# Altium PCB 4_layer.PcbDoc (part 1 of 2)
Units mm, origin at the board's own origin, x right, y up, seen from the top; angles counter-clockwise.
Board outline 78.3 x 43.68 mm, 4 copper layers (Top Layer, GND, PWR, Bottom Layer), stack 1.795 mm thick; 72 components, 60 nets, 280 pads, 137 vias.
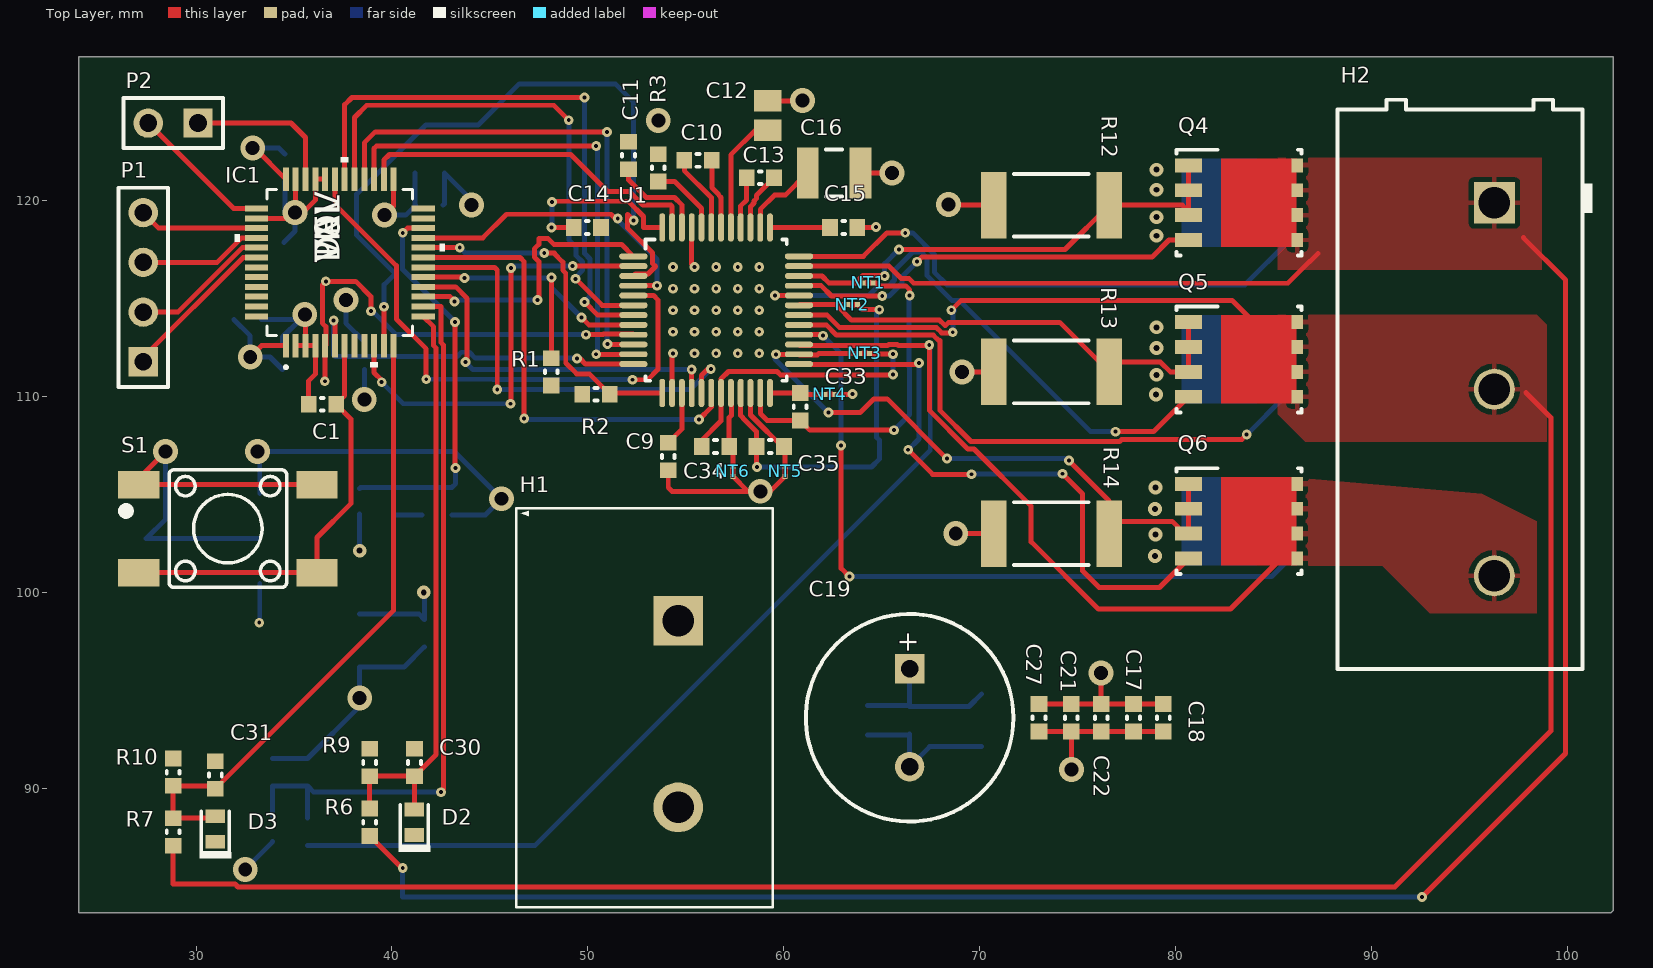
[diagram p0: Top Layer view]
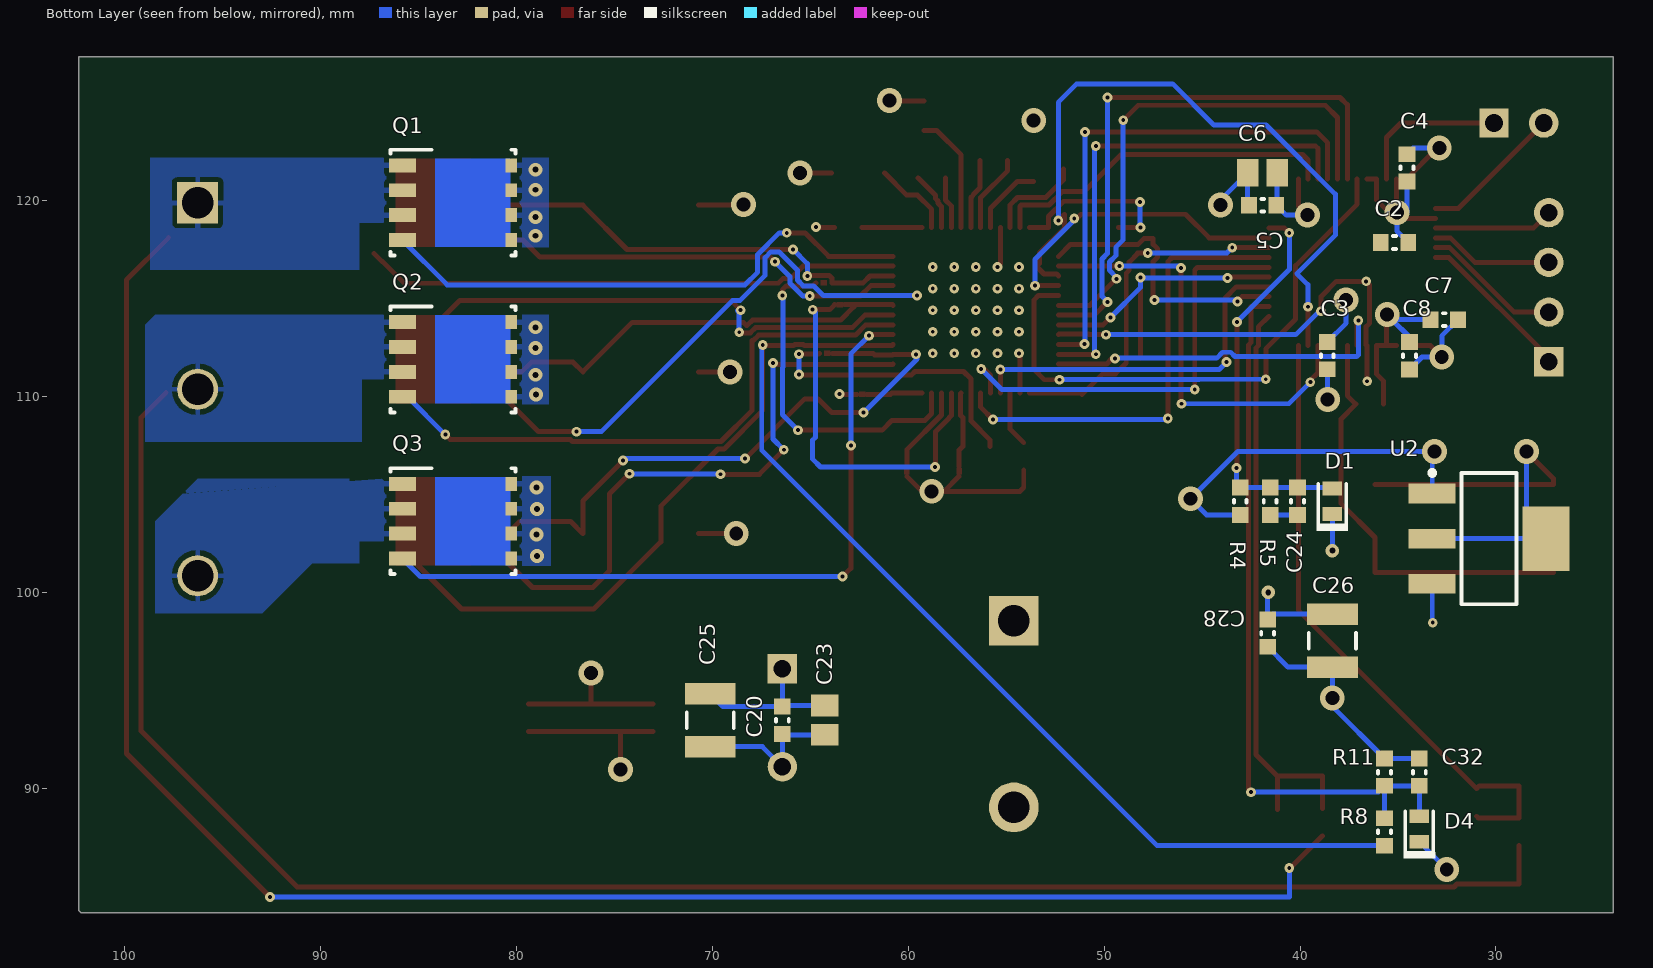
[diagram p1: Bottom Layer view, seen from below]
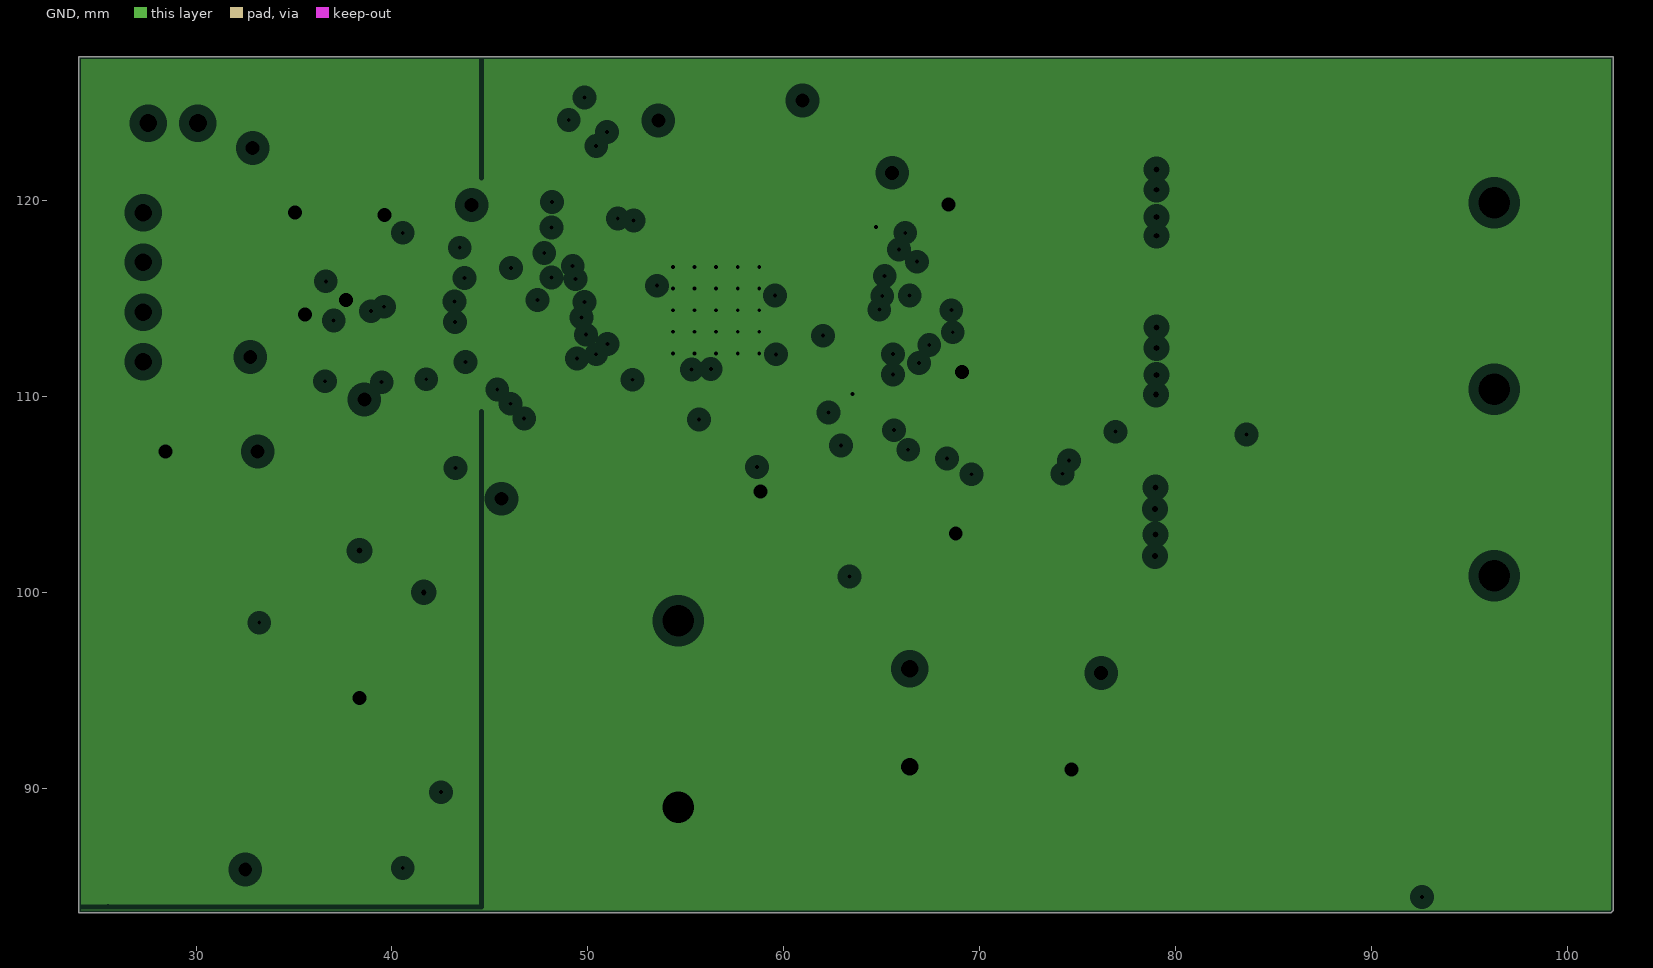
[diagram p2: GND, clearances drawn from the general rule]
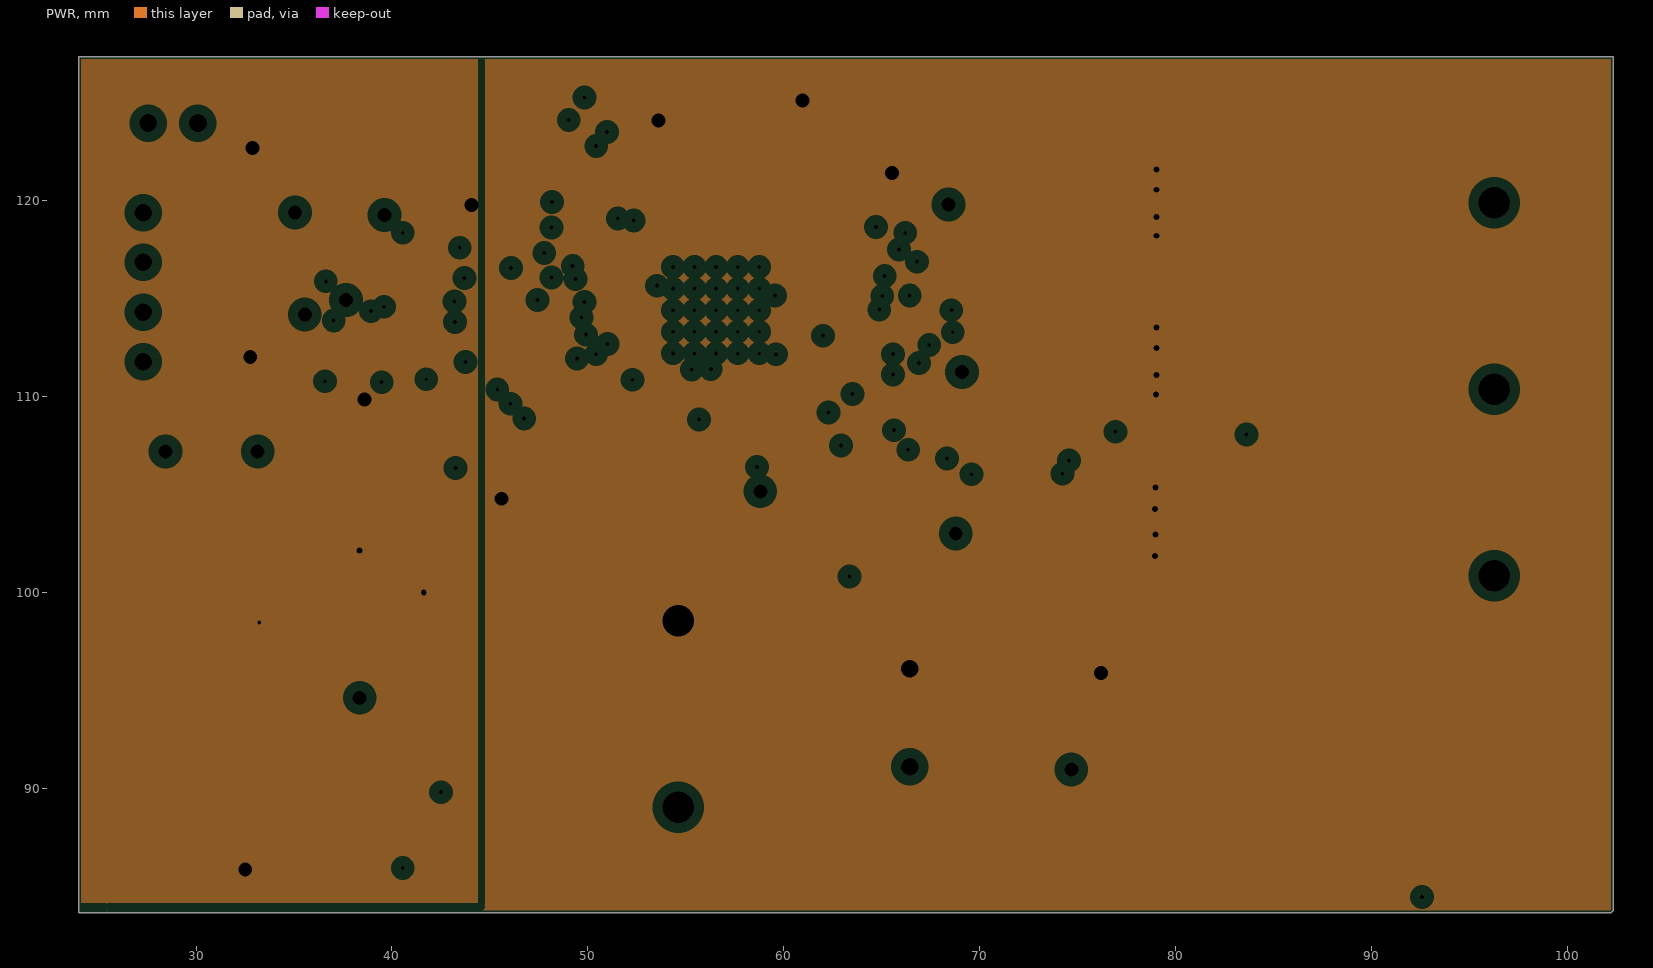
[diagram p3: PWR, clearances drawn from the general rule]

## Layer stack, top to bottom
Top Solder: solder mask 0.0102, Solder Resist, Dk 3.5
Top Layer: signal copper 0.036
Dielectric 2: dielectric 0.127, FR-4, Dk 4.35
GND: plane copper 0.036, net GND
Dielectric 1: dielectric 1.27, FR-4, Dk 4.35
PWR: plane copper 0.036, net PVDD
Dielectric 3: dielectric 0.254, FR-4, Dk 4.35
Bottom Layer: signal copper 0.036
Bottom Solder: solder mask 0.0102, Solder Resist, Dk 3.5

## Board outline
24.025,127.325 102.325,127.325 102.325,83.75 102.225,83.65 24.025,83.65

## Design rules (kind name [scope] priority, off if disabled: settings)
Clearance [All] p1: gap=0.127 ignorepadtopadclearanceinfootprint=FALSE except(0: Arc-Hole Track-Hole SMDPad-Hole THPad-Hole Via-Hole Fill-Hole Poly-Hole Region-Hole Text-Hole)
PlaneClearance [All] p1: clearance=0.508
PlaneConnect [All] p1: planeconnectstyle=Relief reliefexpansion=0.508 reliefentries=4 reliefconductorwidth=0.254 reliefairgap=0.254
PolygonConnect [All] p1: connectstyle=Relief reliefconductorwidth=0.254 reliefentries=4 polygonreliefangle="90 Angle" airgapwidth=0.254
RoutingVias [All] p1: holewidth=0.711 width=1.27 viastyle="Through Hole" minholewidth=0.711 minwidth=1.27 maxholewidth=0.711 maxwidth=1.27 useviatemplates=TRUE viatemplateguid#1={23927A24-ACA0-4F05-B739-5FD15424690F} viatemplateguid#2={854B13DD-6943-4B58-AAA2-0ED32D2AF8CD} viatemplatename#1=v50h20 viatemplatename#2=v127h71
SolderMaskExpansion [All] p1: expansion=0.102
Width [All] p1: maxlimit=0.254 minlimit=0.254 preferedwidth=0.254
28 further rules are at their usual default settings.

## Classes and differential pairs
component class Designator: C17 C18 C19 C20 C21 C22 C23 C24 C25 C26 C27 C28 D1 H1 R4 R5 U2
component class "Driver Stage": C30 C31 C32 C33 C34 C35 D2 D3 D4 H2 NT1 NT2 NT3 NT4 NT5 NT6 Q1 Q2 Q3 Q4 Q5 Q6 R6 R7 R8 R9 R10 R11 R12 R13 R14
component class MCU: C1 C2 C3 C4 C5 C6 C7 C8 P1 P2 S1

## Components (designator, comment, footprint, x,y, rotation, side; value= is the part's Value field where it differs from the comment)
C1 "C1608X7R1H104K" 0603L 36.449,109.601 r180 top value=0.1uF
C2 "C1608X7R1H104K" 0603L 35.179,117.856 r180 bottom value=0.1uF
C3 "C1608X7R1H104K" 0603L 38.608,112.079 r90 bottom value=0.1uF
C4 "C1608X7R1H104K" 0603L 34.544,121.666 r270 bottom value=0.1uF
C5 "C1608X7R1H104K" 0603L 41.91,119.761 r180 bottom value=0.1uF
C6 "GRM21BR71A475KA73L" 0805L 41.922,121.412 r180 bottom value=4.7uF
C7 "C1608X8R1H103K" 0603L 32.639,113.919 r0 bottom value=0.01uF
C8 "C1608X7R1C105K" 0603L 34.417,112.076 r90 bottom value=1uF
C9 "C1608X7R1C105K" 0603L 54.102,106.934 r270 top value=1uF
C10 "C1608X7R1H473K" 0603L 55.626,122.047 r180 top value=0.047uF
C11 "C1608X7R1C105K" 0603L 52.07,122.301 r90 top value=1uF
C12 "GRM21BR71A475KA73L" 0805L 59.182,124.333 r90 top value=4.7uF
C13 "C1608X7R1H473K" 0603L 58.801,121.158 r0 top value=0.047uF
C14 "C1608X7R1C105K" 0603L 49.973,118.618 r180 top value=1uF
C15 "C1608X7R1C105K" 0603L 63.057,118.618 r0 top value=1uF
C16 "GRM32ER72A225KA35L" 1210L 62.564,121.412 r0 top value=2.2uF
C17 "C1608X7R1H104K" 0603L 77.851,93.599 r270 top value=0.1uF
C18 "C1608X7R1H103K" 0603L 79.375,93.599 r270 top value=0.01uF
C19 "ECA-1HM471" M_1000x2000 66.421,93.599 r270 top value=470uF
C20 "C1608X7R1H102K" 0603L 66.421,93.472 r270 bottom value=1000pF
C21 "C1608X7R1H103K" 0603L 74.676,93.599 r270 top value=0.01uF
C22 "C1608X7R1H104K" 0603L 76.2,93.599 r270 top value=0.1uF
C23 "GRM21BR71H105KA12L" 0805L 64.262,93.472 r270 bottom value=1uF
C24 "C0603C104J4RACTU" 0603L 40.132,104.648 r270 bottom value=0.1uF
C25 "GRM32ER71H106KA12L" 1210L 70.104,93.472 r270 bottom value=10uF
C26 "GRM32ER71H106KA12L" 1210L 38.354,97.536 r270 bottom value=10uF
C27 "C1608X7R1H104K" 0603L 73.025,93.599 r270 top value=0.1uF
C28 "C1608X7R1H104K" 0603L 41.656,97.917 r270 bottom value=0.1uF
C30 "C0603C104J4RACTU" 0603L 41.148,91.313 r90 top value=0.1uF
C31 "C0603C104J4RACTU" 0603L 30.988,90.678 r90 top value=0.1uF
C32 "C0603C104J4RACTU" 0603L 33.909,90.82 r90 bottom value=0.1uF
C33 "GRM188R71C102KA01D" 0603L 60.833,109.474 r90 top value=1000pF
C34 "GRM188R71C102KA01D" 0603L 56.515,107.442 r0 top value=1000pF
C35 "GRM188R71C102KA01D" 0603L 59.309,107.442 r0 top value=1000pF
D1 "CD0603-B0130L" Diode_0603 38.354,104.648 r90 bottom value=35V
D2 "CD0603-B0130L" Diode_0603 41.148,88.265 r90 top value=35V
D3 "CD0603-B0130L" Diode_0603 30.988,87.92 r90 top value=35V
D4 "CD0603-B0130L" Diode_0603 33.909,87.92 r90 bottom value=35V
H1 "OSTT7022150" TERM_BLK_OSTT7022150 54.61,98.552 r270 top
H2 "OSTT7032150" On-Shore_OSTT7032150 96.266,110.363 r270 top
IC1 "STM32F301C6" LQFP48-7x7mm 37.338,116.84 r90 top
NT1 "Net-Tie" Net-Tie_10mil 64.3,115.8 r180 top net-tie
NT2 "Net-Tie" Net-Tie_10mil 63.5,114.681 r180 top net-tie
NT3 "Net-Tie" Net-Tie_10mil 64.121,112.2 r180 top net-tie
NT4 "Net-Tie" Net-Tie_10mil 62.357,110.109 r0 top net-tie
NT5 "Net-Tie" Net-Tie_10mil 60.071,106.172 r270 top net-tie
NT6 "Net-Tie" Net-Tie_10mil 57.404,106.172 r270 top net-tie
P1 "" HDR1X4 27.305,111.76 r90 top
P2 "" HDR1X2 30.099,123.952 r180 top
Q1 "CSD18540Q5B" TRANS_NexFET_Q5B 83.04,119.888 r180 bottom value=60V
Q2 "CSD18540Q5B" TRANS_NexFET_Q5B 83.04,111.887 r180 bottom value=60V
Q3 "CSD18540Q5B" TRANS_NexFET_Q5B 83.04,103.632 r180 bottom value=60V
Q4 "CSD18540Q5B" TRANS_NexFET_Q5B 83.431,119.888 r0 top value=60V
Q5 "CSD18540Q5B" TRANS_NexFET_Q5B 83.431,111.887 r0 top value=60V
Q6 "CSD18540Q5B" TRANS_NexFET_Q5B 83.431,103.632 r0 top value=60V
R1 "CRCW060310K0JNEA" 0603L 48.133,111.252 r270 top value=10k
R2 "CRCW060310K0JNEA" 0603L 50.419,110.109 r180 top value=10k
R3 "CRCW0603100RJNEA" 0603L 53.594,121.666 r90 top value=100
R4 "RC0603FR-0762KL" 0603L 43.053,104.648 r270 bottom value=62.0k
R5 "CRCW06034K99FKEA" 0603L 41.529,104.648 r90 bottom value=4.99k
R6 "RC0603FR-0762KL" 0603L 38.862,88.265 r270 top value=62.0k
R7 "RC0603FR-0762KL" 0603L 28.829,87.772 r270 top value=62.0k
R8 "RC0603FR-0762KL" 0603L 35.687,87.772 r270 bottom value=62.0k
R9 "CRCW06034K99FKEA" 0603L 38.862,91.313 r270 top value=4.99k
R10 "CRCW06034K99FKEA" 0603L 28.829,90.82 r270 top value=4.99k
R11 "CRCW06034K99FKEA" 0603L 35.687,90.82 r270 bottom value=4.99k
R12 "LRMAP2512-R005FT4" 2512 73.66,119.761 r0 top value=0.005
R13 "LRMAP2512-R005FT4" 2512 73.66,111.252 r0 top value=0.005
R14 "LRMAP2512-R005FT4" 2512 73.66,102.997 r0 top value=0.005
S1 "4-1437565-1" SW_FSM4JSMA 31.623,103.251 r90 top
U1 "DRV8305NEPHPRQ1" PHP0048G_N 56.549,114.399 r0 top
U2 "TPS7B6933QDCYRQ1" DCY0004A_N 30.353,102.743 r180 bottom

## Footprints (in the part's own frame and the unit in brackets; to place one, negate y for a bottom-side part, rotate by r counter-clockwise, add the part's x,y. Pads: shape width x height; smd on the part's side, far side on the other; paste and mask are expansions set on the pad)
0603L [mm]
  rect 0.8x0.85 smd: 1(-0.7,0) 2(0.7,0)
  silkscreen extent -0.07,-0.33 0.07,0.33, body extent -0.87,-0.47 0.87,0.47, height 0.85
0805L [mm]
  rect 1.1x1.4 smd: 1(-0.75,0) 2(0.75,0)
  body extent -1.1,-0.72 1.1,0.72, height 1.1
1210L [mm]
  rect 1.1x2.6 smd: 1(-1.35,0) 2(1.35,0)
  silkscreen extent -0.4,-1.2 0.4,1.2, body extent -1.7,-1.35 1.7,1.35, height 1.35
2512 [mm]
  rect 1.3x3.4 smd: 1(-2.95,0) 2(2.95,0)
  silkscreen extent -1.9,-1.6 1.9,1.6, body extent -3.22,-1.67 3.22,1.67, height 0.71
DCY0004A_N [mm]
  rect 2.4x1 smd: 1(-2.9,2.3) 2(-2.9,0) 3(-2.9,-2.3)
  rect 2.4x3.3 smd: 4(2.9,0)
  silkscreen extent -3.03,-3.35 1.4,3.47, body extent -3.5,-3.25 3.5,3.25, height 1.62
Diode_0603 [mm]
  rect 0.7x1 smd: 1(-0.65,0) 2(0.65,0)
  silkscreen extent -1.5,-0.8 0.9,0.8, body extent -0.9,-0.5 0.9,0.5, height 0.85
HDR1X2 [mm] "Connector; Header; 2 Position"
  rect 1.5x1.5 hole 0.9: 1(0,0)
  round 1.5 hole 0.9: 2(2.54,0)
  silkscreen extent -1.27,-1.27 3.81,1.27
HDR1X4 [mm] "Connector; Header; 4 Position"
  rect 1.5x1.5 hole 0.9: 1(0,0)
  round 1.5 hole 0.9: 2(2.54,0) 3(5.08,0) 4(7.62,0)
  silkscreen extent -1.27,-1.27 8.89,1.27
LQFP48-7x7mm [mil]
  rect 47x12 smd: 1(-167.32,108.27) 2(-167.32,88.58) 3(-167.32,68.9) 4(-167.32,49.21) 5(-167.32,29.53) 6(-167.32,9.84) 7(-167.32,-9.84) 8(-167.32,-29.53) 9(-167.32,-49.21) 10(-167.32,-68.9) 11(-167.32,-88.58) 12(-167.32,-108.27) 25(167.32,-108.27) 26(167.32,-88.58) 27(167.32,-68.9) 28(167.32,-49.21) 29(167.32,-29.53) 30(167.32,-9.84) 31(167.32,9.84) 32(167.32,29.53) 33(167.32,49.21) 34(167.32,68.9) 35(167.32,88.58) 36(167.32,108.27)
  rect 12x47 smd: 13(-108.27,-167.32) 14(-88.58,-167.32) 15(-68.9,-167.32) 16(-49.21,-167.32) 17(-29.53,-167.32) 18(-9.84,-167.32) 19(9.84,-167.32) 20(29.53,-167.32) 21(49.21,-167.32) 22(68.9,-167.32) 23(88.58,-167.32) 24(108.27,-167.32) 37(108.27,167.32) 38(88.58,167.32) 39(68.9,167.32) 40(49.21,167.32) 41(29.53,167.32) 42(9.84,167.32) 43(-9.84,167.32) 44(-29.53,167.32) 45(-49.21,167.32) 46(-68.9,167.32) 47(-88.58,167.32) 48(-108.27,167.32)
  silkscreen extent -214,-211 211,211, body extent 0,0 10,10, height 10
M_1000x2000 [mm]
  rect 1.5x1.5 hole 0.9: 1(-2.5,0)
  round 1.5 hole 0.9: 2(2.5,0)
  silkscreen extent -5.3,-5.3 5.3,5.3, body extent -5.21,-5.24 5.24,5.24, height 22.01
Net-Tie_10mil [mil]
  rect 10x10 smd paste-5 mask-5: 1(-10,0) 2(10,0)
  Top Layer region: -6,5 6,5 6,-5 -6,-5
On-Shore_OSTT7032150 [mm]
  rect 2.1x2.1 hole 1.6: 1(-9.52,0)
  round 2.1 hole 1.6: 2(0,0) 3(9.52,0)
  silkscreen extent -14.78,-8 14.28,5, body extent -14.78,-8 14.28,4.5, height 21.5
PHP0048G_N [mm]
  oval 1.45x0.3 smd: 1(-4.225,2.75) 2(-4.225,2.25) 3(-4.225,1.75) 4(-4.225,1.25) 5(-4.225,0.75) 6(-4.225,0.25) 7(-4.225,-0.25) 8(-4.225,-0.75) 9(-4.225,-1.25) 10(-4.225,-1.75) 11(-4.225,-2.25) 12(-4.225,-2.75) 25(4.225,-2.75) 26(4.225,-2.25) 27(4.225,-1.75) 28(4.225,-1.25) 29(4.225,-0.75) 30(4.225,-0.25) 31(4.225,0.25) 32(4.225,0.75) 33(4.225,1.25) 34(4.225,1.75) 35(4.225,2.25) 36(4.225,2.75)
  oval 0.3x1.45 smd: 13(-2.75,-4.225) 14(-2.25,-4.225) 15(-1.75,-4.225) 16(-1.25,-4.225) 17(-0.75,-4.225) 18(-0.25,-4.225) 19(0.25,-4.225) 20(0.75,-4.225) 21(1.25,-4.225) 22(1.75,-4.225) 23(2.25,-4.225) 24(2.75,-4.225) 37(2.75,4.225) 38(2.25,4.225) 39(1.75,4.225) 40(1.25,4.225) 41(0.75,4.225) 42(0.25,4.225) 43(-0.25,4.225) 44(-0.75,4.225) 45(-1.25,4.225) 46(-1.75,4.225) 47(-2.25,4.225) 48(-2.75,4.225)
  rrect2% 5.17x5.17 on Plane1: 49(0,0)
  silkscreen extent -3.6,-3.6 3.6,3.6, body extent -4.51,-4.51 4.51,4.51, height 1.2
SW_FSM4JSMA [mm]
  rect 1.4x2.1 smd: 1(2.25,4.55) 2(2.25,-4.55) 3(-2.25,4.55) 4(-2.25,-4.55)
  silkscreen extent -3,-3 3,5.4, body extent -3,-5 3,5, height 5.1
TERM_BLK_OSTT7022150 [mm]
  rect 2.54x2.54 hole 1.6: 1(0,0)
  round 2.54 hole 1.6: 2(9.525,0)
  silkscreen extent -5.74,-8.28 14.63,4.83, body extent -5.3,-8 14.33,4.5, height 21.6
TRANS_NexFET_Q5B [mm]
  rect 1.372x0.71 smd paste-0.4: 1(-2.776,1.905) 2(-2.776,0.635) 3(-2.776,-0.635) 4(-2.776,-1.905)
  rect 0.59x0.71 smd paste-0.3: 5(2.776,-1.905) 6(2.776,-0.635) 7(2.776,0.635) 8(2.776,1.905)
  Top Layer region: -1.106,2.26 2.744,2.26 2.744,-2.26 -1.106,-2.26
  silkscreen extent -3.39,-2.7 3,2.7, body extent -3.23,-2.55 2.87,2.55, height 1.06

## Part data
C1 C2 C3 C4 C5 C17 C22 C27 C28: "CAP, CERM, 0.1 µF, 50 V, +/- 10%, X7R, 0603", Cap_Case=0603, Manufacturer=TDK, Supplier Part Number 1=445-1314-1-ND, TempCo=X7R, Tolerance_%=10, Value1="0.017 ohm", Value2=50V, ValueDisplayed=0.1µF, AEC Category=Q200, AEC Qualified=?, Cap_F=0.0000001, ComponentLink1Description="Datasheet link", ComponentLink1URL=http://www.tdk.co.jp/tefe02/e412_c.pdf, CompType=Capacitor, ESR_ohm=0.017, LatestRevisionDate=2015-12-04, MountType=SMT, PackageReference=0603, PartNumber=C1608X7R1H104K, Polarized=N, Published=2008-06-19, Publisher="Texas Instruments", RoHS=Y, Supplier 1=Digi-Key, Supplier 2=Farnell, Supplier Part Number 2=1118182, SymbolVersion=2008-07-09, TaMax_C=125, TaMin_C=-55, Technology=Ceramic, U/M=EA, VDC_V=50
C6 C12: "CAP, CERM, 4.7 µF, 10 V, +/- 10%, X7R, 0805", Cap_Case=0805, Manufacturer=MuRata, Supplier Part Number 1=GRM21BR71A475KA73L-ND, TempCo=X7R, Tolerance_%=10, Value1=Unknown, Value2=10V, ValueDisplayed=4.7µF, AEC Category=Q200, AEC Qualified=?, Cap_F=0.0000047, ComponentLink1Description="Datasheet link", ComponentLink1URL=http://search.murata.co.jp/Ceramy/PnsearchViewAction.do?HnOFG=ON&HnNFG=ON&SEL_CNT=50&sLang=en&sKey=GRM21BR71A475KA73L&x=9&y=9&search=startwith, CompType=Capacitor, LatestRevisionDate=2015-12-04, MountType=SMT, PackageReference=0805, PartNumber=GRM21BR71A475KA73L, Polarized=N, Published=2008-06-19, Publisher="Texas Instruments", RoHS=Y, Supplier 1=Digi-Key, Supplier 2=Mouser, Supplier 3=Farnell, Supplier Part Number 2=81-GRM21BR71A475KA73, Supplier Part Number 3=1845769, SymbolVersion=2008-07-09, TaMax_C=125, TaMin_C=-55, Technology=Ceramic, U/M=EA, VDC_V=10
C7: "CAP, CERM, 0.01 µF, 50 V, +/- 10%, X8R, 0603", Cap_Case=0603, Manufacturer=TDK, Supplier Part Number 1=445-2504-1-ND, TempCo=X8R, Tolerance_%=10, Value1="0.051 ohm", Value2=50V, ValueDisplayed=0.01µF, AEC Category=Q200, AEC Qualified=?, Cap_F=0.00000001, ComponentLink1Description="Datasheet link", ComponentLink1URL=http://www.tdk.com/pdf/X8R.pdf, CompType=Capacitor, ESR_ohm=0.051, LatestRevisionDate=2015-12-04, MountType=SMT, PackageReference=0603, PartNumber=C1608X8R1H103K, Polarized=N, Published=2008-06-19, Publisher="Texas Instruments", RoHS=Y, Supplier 1=Digi-Key, Supplier 2=Farnell, Supplier Part Number 2=1844454, SymbolVersion=2008-07-09, TaMax_C=150, TaMin_C=-55, Technology=Ceramic, U/M=EA, VDC_V=50
C8 C9 C11 C14 C15: "CAP, CERM, 1 µF, 16 V, +/- 10%, X7R, 0603", Cap_Case=0603, Manufacturer=TDK, Supplier Part Number 1=445-1604-1-ND, TempCo=X7R, Tolerance_%=10, Value1="0.0057 ohm", Value2=16V, ValueDisplayed=1µF, AEC Category=Q200, AEC Qualified=?, Cap_F=0.000001, ComponentLink1Description="Datasheet link", ComponentLink1URL=http://www.tdk.co.jp/tefe02/e412_c.pdf, CompType=Capacitor, ESR_ohm=0.0057, LatestRevisionDate=2015-12-04, MountType=SMT, PackageReference=0603, PartNumber=C1608X7R1C105K, Polarized=N, Published=2008-06-19, Publisher="Texas Instruments", RoHS=Y, Supplier 1=Digi-Key, Supplier 2=Farnell, Supplier Part Number 2=1907343, SymbolVersion=2008-07-09, TaMax_C=125, TaMin_C=-55, Technology=Ceramic, U/M=EA, VDC_V=16
C10 C13: "CAP, CERM, 0.047 µF, 50 V, +/- 10%, X7R, 0603", Cap_Case=0603, Manufacturer=TDK, Supplier Part Number 1=445-1313-1-ND, TempCo=X7R, Tolerance_%=10, Value1="0.0234 ohm", Value2=50V, ValueDisplayed=0.047µF, AEC Category=Q200, AEC Qualified=?, Cap_F=0.000000047, ComponentLink1Description="Datasheet link", ComponentLink1URL=http://www.tdk.co.jp/tefe02/e412_c.pdf, CompType=Capacitor, ESR_ohm=0.0234, LatestRevisionDate=2015-12-09, MountType=SMT, PackageReference=0603, PartNumber=C1608X7R1H473K, Polarized=N, Published=2008-06-19, Publisher="Texas Instruments", RoHS=Y, Supplier 1=Digi-Key, Supplier 2=Farnell, Supplier Part Number 2=1907317, SymbolVersion=2008-07-09, TaMax_C=125, TaMin_C=-55, Technology=Ceramic, U/M=EA, VDC_V=50
C16: "CAP, CERM, 2.2 µF, 100 V, +/- 10%, X7R, 1210", Cap_Case=1210, Manufacturer=MuRata, Supplier Part Number 1=490-3385-1-ND, TempCo=X7R, Tolerance_%=10, Value1="0.007 ohm", Value2=100V, ValueDisplayed=2.2µF, AEC Category=Q200, AEC Qualified=?, Cap_F=0.0000022, ComponentLink1Description="Datasheet link", ComponentLink1URL=http://search.murata.co.jp/Ceramy/PnsearchViewAction.do?HnOFG=ON&HnNFG=ON&SEL_CNT=50&sLang=en&sKey=GRM32ER72A225KA35L&x=9&y=9&search=startwith, CompType=Capacitor, ESR_ohm=0.007, IRMS_A=4.4, LatestRevisionDate=2015-12-04, MountType=SMT, PackageReference=1210, PartNumber=GRM32ER72A225KA35L, Polarized=N, Published=2008-06-19, Publisher="Texas Instruments", RoHS=Y, Supplier 1=Digi-Key, Supplier 2=Mouser, Supplier 3=Farnell, Supplier Part Number 2=81-GRM32ER72A225KA35, Supplier Part Number 3=1735547, SymbolVersion=2008-07-09, TaMax_C=125, TaMin_C=-55, Technology=Ceramic, U/M=EA, VDC_V=100
C18 C21: "CAP, CERM, 0.01 µF, 50 V, +/- 10%, X7R, 0603", Cap_Case=0603, Manufacturer=TDK, Supplier Part Number 1=445-1311-1-ND, TempCo=X7R, Tolerance_%=10, Value1="0.0539 ohm", Value2=50V, ValueDisplayed=0.01µF, AEC Category=Q200, AEC Qualified=?, Cap_F=0.00000001, ComponentLink1Description="Datasheet link", ComponentLink1URL=http://www.tdk.co.jp/tefe02/e412_c.pdf, CompType=Capacitor, ESR_ohm=0.0539, LatestRevisionDate=2015-12-04, MountType=SMT, PackageReference=0603, PartNumber=C1608X7R1H103K, Polarized=N, Published=2008-06-19, Publisher="Texas Instruments", RoHS=Y, Supplier 1=Digi-Key, Supplier 2=Farnell, Supplier Part Number 2=1907315, SymbolVersion=2008-07-09, TaMax_C=125, TaMin_C=-55, Technology=Ceramic, U/M=EA, VDC_V=50
C19: "CAP, AL, 470 µF, 50 V, +/- 20%, TH", Cap_Case=10x20mm, Manufacturer=Panasonic, Supplier Part Number 1=P5185-ND, Tolerance_%=20, Value1=Unknown, Value2=50V, ValueDisplayed=470µF, AEC Category=Q200, AEC Qualified=?, Cap_F=0.00047, ComponentLink1Description="Datasheet link", ComponentLink1URL=http://industrial.panasonic.com/www-data/pdf/ABA0000/ABA0000CE12.pdf, CompType=Capacitor, IRMS_A=0.65, LatestRevisionDate=2015-12-17, MountType=TH, PackageReference=10x20, PartNumber=ECA-1HM471, Polarized=Y, Publisher="Texas Instruments", RoHS=Y, Series=M, Supplier 1=Digi-Key, Supplier 2=Mouser, Supplier 3=Farnell, Supplier Part Number 2=667-ECA-1HM471, Supplier Part Number 3=9693815, SymbolVersion=2008-07-09, TaMax_C=85, TaMin_C=-40, Technology=AL, U/M=EA, VDC_V=50
C20: "CAP, CERM, 1000 pF, 50 V, +/- 10%, X7R, 0603", Cap_Case=0603, Manufacturer=TDK, Supplier Part Number 1=445-1308-1-ND, TempCo=X7R, Tolerance_%=10, Value1="0.24 ohm", Value2=50V, ValueDisplayed=1000pF, AEC Category=Q200, AEC Qualified=?, Cap_F=0.000000001, ComponentLink1Description="Datasheet link", ComponentLink1URL=http://www.tdk.co.jp/tefe02/e412_c.pdf, CompType=Capacitor, ESR_ohm=0.24, LatestRevisionDate=2015-12-04, MountType=SMT, PackageReference=0603, PartNumber=C1608X7R1H102K, Polarized=N, Published=2008-06-19, Publisher="Texas Instruments", RoHS=Y, Supplier 1=Digi-Key, Supplier 2=Farnell, Supplier Part Number 2=1844239, SymbolVersion=2008-07-09, TaMax_C=125, TaMin_C=-55, Technology=Ceramic, U/M=EA, VDC_V=50
C23: "CAP, CERM, 1 µF, 50 V, +/- 10%, X7R, 0805", Cap_Case=0805, Manufacturer=MuRata, Supplier Part Number 1=490-4736-1-ND, TempCo=X7R, Tolerance_%=10, Value1=Unknown, Value2=50V, ValueDisplayed=1µF, AEC Category=Q200, AEC Qualified=?, Cap_F=0.000001, ComponentLink1Description="Datasheet link", ComponentLink1URL=http://search.murata.co.jp/Ceramy/PnsearchViewAction.do?HnOFG=ON&HnNFG=ON&SEL_CNT=50&sLang=en&sKey=GRM21BR71H105KA12L&x=9&y=9&search=startwith, CompType=Capacitor, LatestRevisionDate=2015-12-04, MountType=SMT, PackageReference=0805, PartNumber=GRM21BR71H105KA12L, Polarized=N, Published=2008-06-19, Publisher="Texas Instruments", RoHS=Y, Supplier 1=Digi-Key, Supplier 2=Mouser, Supplier 3=Farnell, Supplier Part Number 2=81-GRM21BR71H105KA2L, Supplier Part Number 3=1735541, SymbolVersion=2008-07-09, TaMax_C=125, TaMin_C=-55, Technology=Ceramic, U/M=EA, VDC_V=50
C24 C30 C31 C32: "CAP, CERM, 0.1 µF, 16 V, +/- 5%, X7R, 0603", Cap_Case=0603, Manufacturer=Kemet, Supplier Part Number 1=399-1097-1-ND, TempCo=X7R, Tolerance_%=5, Value1=Unknown, Value2=16V, ValueDisplayed=0.1µF, AEC Category=Q200, AEC Qualified=?, Cap_F=0.0000001, ComponentLink1Description="Datasheet link", ComponentLink1URL=http://www.kemet.com/kemet/web/homepage/kechome.nsf/vapubfiles/F3102_Y5V.pdf/$file/F3102_Y5V.pdf, CompType=Capacitor, LatestRevisionDate=2015-12-04, MountType=SMT, PackageReference=0603, PartNumber=C0603C104J4RACTU, Polarized=N, Published=2008-06-19, Publisher="Texas Instruments", RoHS=Y, Supplier 1=Digi-Key, Supplier 2=Mouser, Supplier 3=Farnell, Supplier Part Number 2=80-C0603C104J4R, Supplier Part Number 3=1650834, SymbolVersion=2008-07-09, TaMax_C=125, TaMin_C=-55, Technology=Ceramic, U/M=EA, VDC_V=16
C25 C26: "CAP, CERM, 10 µF, 50 V, +/- 10%, X7R, 1210", Cap_Case=1210, Manufacturer=MuRata, Supplier Part Number 1=490-6544-1-ND, TempCo=X7R, Tolerance_%=10, Value1=Unknown, Value2=50V, ValueDisplayed=10µF, AEC Category=Q200, AEC Qualified=?, Cap_F=0.00001, ComponentLink1Description="Datasheet link", ComponentLink1URL=http://www.murata.com/products/catalog/pdf/c02e.pdf, CompType=Capacitor, LatestRevisionDate=2015-12-04, MountType=SMT, PackageReference=1210, PartNumber=GRM32ER71H106KA12L, Polarized=N, Published=2008-06-19, Publisher="Texas Instruments", RoHS=Y, Supplier 1=Digi-Key, Supplier 2=Mouser, Supplier Part Number 2=81-GRM32ER71H106KA2L, SymbolVersion=2008-07-09, TaMax_C=125, TaMin_C=-55, Technology=Ceramic, U/M=EA, VDC_V=50
C33 C34 C35: "CAP, CERM, 1000 pF, 16 V, +/- 10%, X7R, 0603", Cap_Case=0603, Manufacturer=MuRata, Supplier Part Number 1=GRM188R71C102KA01D-ND, TempCo=X7R, Tolerance_%=10, Value1=Unknown, Value2=16V, ValueDisplayed=1000pF, AEC Category=Q200, AEC Qualified=?, Cap_F=0.000000001, ComponentLink1Description="Datasheet link", ComponentLink1URL=http://search.murata.co.jp/Ceramy/PnsearchViewAction.do?HnOFG=ON&HnNFG=ON&SEL_CNT=50&sLang=en&sKey=GRM188R71C102KA01D&x=9&y=9&search=startwith, CompType=Capacitor, LatestRevisionDate=2015-12-04, MountType=SMT, PackageReference=0603, PartNumber=GRM188R71C102KA01D, Polarized=N, Published=2008-06-19, Publisher="Texas Instruments", RoHS=Y, Supplier 1=Digi-Key, Supplier 2=Mouser, Supplier Part Number 2=81-GRM188R71C102KA1D, SymbolVersion=2008-07-09, TaMax_C=125, TaMin_C=-55, Technology=Ceramic, U/M=EA, VDC_V=16
D1 D2 D3 D4: "Diode, Schottky, 35 V, 0.1 A, 0603 Diode", Manufacturer=Bourns, Supplier Part Number 1=652-CD0603-B0130L, Value1=0.1A, Value2=0.44V, AEC Category=Q101, AEC Qualified=?, ComponentLink1Description="Datasheet link", ComponentLink1URL=http://www.bourns.com/pdfs/SBCD0603_1005.pdf, CompType=Diode, Io_A=0.1, LatestRevisionDate=2015-11-30, MountType=SMT, PackageReference="0603 Diode", PartNumber=CD0603-B0130L, Published=2008-06-26, Publisher="Texas Instruments", RoHS=Y, Supplier 1=Mouser, Supplier 2=Farnell, Supplier Part Number 2=7599572, SymbolVersion=2008-12-08, TJmax_C=125, Type=Schottky, U/M=EA, Vf_V=0.44, Vr_V=35
H1: "Terminal Block, 30A, 9.52mm (.375) Pitch, 2-Pos, TH", Manufacturer="On-Shore Technology", Supplier Part Number 1=ED2677-ND, ComponentLink1Description="Datasheet URL", ComponentLink1URL=http://on-shore.com/sites/default/files/manuals/OSTT7XX2150.pdf, CompType=Connector, LatestRevisionDate=2015-12-23, MountType=TH, PackageReference=19.62x21.5x12.5mm, PartNumber=OSTT7022150, Publisher="Texas Instruments", RoHS=Y, Supplier 1=Digi-Key, SymbolCreator=a0412235, SymbolVersion=2013-10-31
H2: "Terminal Block, 3x1, 9.52mm, TH", Color=Green, Manufacturer="On-Shore Technology", Supplier Part Number 1=ED2678-ND, ComponentLink1Description="Datasheet URL", ComponentLink1URL=http://www.on-shore.com/sites/default/files/manuals/OSTT7XX2150.pdf, CompType="Terminal Block", ContactFinish=Brass, Gender=Female, LatestRevisionDate=2015-12-23, MountType=TH, Orientation=Vertical, PackageReference="Terminal Block, 3x1, 9.52mm, TH", PartNumber=OSTT7032150, PinCount=3, Pitch_mm=9.52, Publisher="Texas Instruments", RoHS=Y, Row_Count=1, Supplier 1=Digi-Key, SymbolCreator=a0412235, SymbolVersion=2013-10-03
NT1 NT2 NT3 NT4 NT5 NT6: "Single point connection between nets.", LatestRevisionDate=2015-10-18, LatestRevisionNote="Added Alternate PartNumber and Alternate Manufacturer parameters to appropriate components.", MountType=SMT, PackageReference=N/A, Publisher="Texas Instruments", SymbolCreator=codlsc, SymbolVersion=2009-07-01
P1: library part "Header 4", "Header, 4-Pin", LatestRevisionDate=17-Jul-2002, LatestRevisionNote="Re-released for DXP Platform.", Publisher="Altium Limited"
P2: library part "Header 2", "Header, 2-Pin", LatestRevisionDate=17-Jul-2002, LatestRevisionNote="Re-released for DXP Platform.", Publisher="Altium Limited"
Q1 Q2 Q3 Q4 Q5 Q6: "MOSFET, N-CH, 60 V, 28 A, SON 5x6mm", Alternate Manufacturer=None, Manufacturer="Texas Instruments", Value1="0.0033 ohm", Value2="41 nC", AEC Category=Q101, AEC Qualified=N, ChType=N, ComponentLink1Description="Datasheet link", ComponentLink1URL=http://www.ti.com/lit/ds/symlink/csd18540q5b.pdf, CompType=MOSFET, IdsMax_A=28, LatestRevisionDate=2015-12-03, LatestRevisionNote="Added parts.", MountType=SMT, PackageReference="SON 5x6mm", PartNumber=CSD18540Q5B, Published=2008-06-19, Publisher="Texas Instruments", QgTyp_nC=41, Rdson45_ohm=0.0033, RoHS=Y, SymbolVersion=2008-07-09, U/M=EA, VdsMax_V=60, Vgs_V=20
R1 R2: "RES, 10 k, 5%, 0.1 W, 0603", Manufacturer=Vishay-Dale, Power_W=0.1, Supplier Part Number 1=541-10KGCT-ND, TempCo="200 ppm/C", Tolerance_%=5, Value1=5%, Value2=0.1W, Value_Code=10k0, ValueDisplayed=10k, AEC Category=Q200, AEC Qualified=?, ComponentLink1Description="Datasheet link", ComponentLink1URL=http://www.vishay.com/docs/20035/dcrcwe3.pdf, CompType=Resistor, EIA_Code=E24, LatestRevisionDate=2015-11-22, MountType=SMT, PackageReference=0603, PartNumber=CRCW060310K0JNEA, Published=2008-06-26, Publisher="Texas Instruments", Res_ohm=10000, RoHS=Y, Supplier 1=Digi-Key, Supplier 2=Mouser, Supplier 3=Farnell, Supplier Part Number 2=71-CRCW0603J-10K-E3, Supplier Part Number 3=1469749, SymbolVersion=2009-05-29, Technology="Thick Film", U/M=EA, VDC_V=75
R3: "RES, 100, 5%, 0.1 W, 0603", Manufacturer=Vishay-Dale, Power_W=0.1, Supplier Part Number 1=541-100GCT-ND, TempCo="200 ppm/C", Tolerance_%=5, Value1=5%, Value2=0.1W, Value_Code=100R, ValueDisplayed=100, AEC Category=Q200, AEC Qualified=?, ComponentLink1Description="Datasheet link", ComponentLink1URL=http://www.vishay.com/docs/20035/dcrcwe3.pdf, CompType=Resistor, EIA_Code=E24, LatestRevisionDate=2015-11-22, MountType=SMT, PackageReference=0603, PartNumber=CRCW0603100RJNEA, Published=2008-06-26, Publisher="Texas Instruments", Res_ohm=100, RoHS=Y, Supplier 1=Digi-Key, Supplier 2=Mouser, Supplier 3=Farnell, Supplier Part Number 2=71-CRCW0603J-100-E3, Supplier Part Number 3=1514715, SymbolVersion=2009-05-29, Technology="Thick Film", U/M=EA, VDC_V=75
R4 R6 R7 R8: "RES, 62.0 k, 1%, 0.1 W, 0603", Manufacturer="Yageo America", Power_W=0.1, Supplier Part Number 1=311-62.0KHRCT-ND, TempCo="200 ppm/C", Tolerance_%=1, Value1=1%, Value2=0.1W, Value_Code=62k0, ValueDisplayed=62.0k, AEC Category=Q200, AEC Qualified=?, ComponentLink1Description="Datasheet link", ComponentLink1URL=http://www.yageo.com/pdf/Pu-RC0603_51_PbFree_L_2.pdf, CompType=Resistor, LatestRevisionDate=2015-11-22, MountType=SMT, PackageReference=0603, PartNumber=RC0603FR-0762KL, Published=2008-06-26, Publisher="Texas Instruments", Res_ohm=62000, RoHS=Y, Supplier 1=Digi-Key, Supplier 2=Mouser, Supplier Part Number 2=603-RC0603FR-0762KL, SymbolVersion=2009-05-29, Technology="Thick Film", U/M=EA, VDC_V=150
R5 R9 R10 R11: "RES, 4.99 k, 1%, 0.1 W, 0603", Manufacturer=Vishay-Dale, Power_W=0.1, Supplier Part Number 1=541-4.99KHCT-ND, TempCo="100 ppm/C", Tolerance_%=1, Value1=1%, Value2=0.1W, Value_Code=4k99, ValueDisplayed=4.99k, AEC Category=Q200, AEC Qualified=?, ComponentLink1Description="Datasheet link", ComponentLink1URL=http://www.vishay.com/docs/20035/dcrcwe3.pdf, CompType=Resistor, EIA_Code=E96, LatestRevisionDate=2015-11-22, MountType=SMT, PackageReference=0603, PartNumber=CRCW06034K99FKEA, Published=2008-06-26, Publisher="Texas Instruments", Res_ohm=4990, RoHS=Y, Supplier 1=Digi-Key, Supplier 2=Mouser, Supplier 3=Farnell, Supplier Part Number 2=71-CRCW0603-4.99K-E3, Supplier Part Number 3=1652885, SymbolVersion=2009-05-29, Technology="Thick Film", U/M=EA, VDC_V=75
R12 R13 R14: library part PMR100HZPFU5L00, "RES SMD 0.005 OHM 1% 3W 2512", Manufacturer="TT Electronics/Welwyn", Power_W=3, Supplier Part Number 1=985-1558-1-ND, TempCo="100 ppm/C", Tolerance_%=1, Value1=1%, Value2=3W, Value_Code=5L000, ValueDisplayed=0.005, AEC Category=Q200, AEC Qualified=?, ComponentLink1Description="Datasheet link", ComponentLink1URL=http://www.digikey.com/product-detail/en/LRMAP2512-R005FT4/985-1558-1-ND/4021294, CompType=Resistor, LatestRevisionDate=2015-12-18, MountType=SMT, PackageReference=2512, PartNumber=LRMAP2512-R005FT4, Published=2008-06-26, Publisher="Texas Instruments", Res_ohm=0.005, RoHS=Y, Supplier 1=Digi-Key, SymbolVersion=2009-05-29, Technology="Thick Film", U/M=EA
S1: "Switch, Tactile, SPST-NO, 0.05A, 12V, SMT", CurrentRating_mA=50, Manufacturer="TE Connectivity", Supplier Part Number 1=450-1129-ND, Circuit=SPST-NO, ComponentLink1Description="Datasheet URL", ComponentLink1URL=http://www.te.com/commerce/DocumentDelivery/DDEController?Action=showdoc&DocId=Customer+Drawing%7F2-1437565-7%7FU2%7Fpdf%7FEnglish%7FENG_CD_2-1437565-7_U2.pdf%7F4-1437565-1, CompType=Switch, LatestRevisionDate=2015-11-30, MountType=SMT, Orientation="Top Actuated", PackageReference="SW, SPST 6x6 mm", PartNumber=4-1437565-1, PositionCount=1, Publisher="Texas Instruments", RoHS=Y, Supplier 1=Digi-Key, Supplier 2=Mouser, Supplier Part Number 2=506-FSM4JSMA, SwitchFunction=Off-Mom, SymbolCreator=a0412235, SymbolVersion=2013-06-27, VDC_V=12
U1: library part DRV83053EPHPRQ1, "Three Phase Automotive Gate Driver with Three Integrated Current Shunt Amplifiers and Voltage Regulator, PHP0048G", Alternate Manufacturer="Texas Instruments", Alternate PartNumber=DRV8305NEPHPQ1, ComponentLink1Description="Datasheet Link", ComponentLink1URL=https://sps06.itg.ti.com/sites/KMS/crossdivteams/altium/docs/ComponentDatasheets/TI_Q100_3PhPredriver_DRV8305_v9.pdf, CompType=IC, LatestRevisionDate=2015-12-21, Manufacturer="Texas Instruments", MountType=SMT, PackageReference=PHP0048G, PartNumber=DRV8305NEPHPRQ1, Publisher="Texas Instruments", SymbolCreator=Altium, SymbolVersion=2015-02-03, U/M=EA
U2: "High Voltage Ultra Low Iq - Low Drop Out Regulator, DCY0004A", Alternate Manufacturer="Texas Instruments", ComponentLink1Description="Datasheet Link", ComponentLink1URL=http://www.ti.com/lit/ds/symlink/tps7b6933-q1.pdf, CompType=IC, LatestRevisionDate=2015-12-29, Manufacturer="Texas Instruments", MountType=SMT, PackageReference=DCY0004A, PartNumber=TPS7B6933QDCYRQ1, Publisher="Texas Instruments", SymbolCreator=Altium, SymbolVersion=2014-08-05, U/M=EA

## Via types
v1: diameter 0.5, hole 0.2, Top Layer to Bottom Layer, 101 vias
v2: diameter 1.27, hole 0.711, Top Layer to Bottom Layer, 22 vias
v3: diameter 0.7, hole 0.3, Top Layer to Bottom Layer, 14 vias

## Nets (pads, with @x,y where several pads share a name; then routed paths per layer and width w, separated by ;. In a path a pad name is that pad's centre, name@x,y a point inside that pad or via, vN(x,y) a via of type N, cw(c..) or ccw(c..) an arc to the next point about the centre after c; other vN are vias at no path point)
GND: C1.2 C2.2 C3.2 C4.2 C5.2 C6.2 C7.2 C8.2 C9.2 C11.2 C15.2 C17.2 C18.2 C19.2 C20.2 C21.2 C22.2 C23.2 C24.2 C25.2 C26.2 C27.2 C28.2 C30.2 C31.2 C32.2 H1.2 IC1.2 IC1.3 IC1.4 IC1.8 IC1.23 IC1.25 IC1.32 IC1.33 IC1.35 IC1.38 IC1.43 IC1.44 IC1.45 IC1.46 IC1.47 NT4.2 NT5.2 NT6.2 R5.1 R9.1 R10.1 R11.1 R12.1 R13.1 R14.1 S1.1 S1.2 U1.14 U1.45 U2.2 U2.4 | length 101.3
  Top Layer w0.254: v2(28.448,107.188) 27.073,105.813 S1.1 S1.2 ; IC1.38 34.762,119.09 v2(35.052,119.38) ; IC1.2 IC1.3 ; IC1.35 35.088,119.416 v2(35.052,119.38) ; v2(35.552,114.181) 35.588,114.145 IC1.3 ; C1.2 35.749,110.799 36.088,111.138 IC1.4 IC1.3 ; IC1.32 IC1.33 36.088,120.013 35.455,119.38 v2(35.052,119.38) ; v2(39.624,119.253) 40.088,119.717 IC1.25 ; C9.2 54.102,105.348 54.294,105.156 v2@58.166,105.156 ; U1.14 54.299,112.149 v1(54.349,112.199) ; U1.45 55.299,116.749 v1(55.449,116.599) ; NT6.2 v2@58.166,105.156 ; NT5.2 59.309,105.156 v2(58.801,105.156) v2@58.166,105.156 ; NT4.2 63.484,110.109 v1(63.5,110.125) ; C15.2 64.668,118.618 v1(64.7,118.65) ; v2(68.4,119.8) 68.439,119.761 R12.1 ; v2(68.778,102.997) R14.1 ; v2(69.1,111.25) 69.102,111.252 R13.1 ; C27.2 C21.2 ; v2(74.675,90.95) v2(74.675,90.95) C21.2 ; C18.2 C17.2 C22.2 C21.2
  Bottom Layer w0.254: v2(28.448,107.188) 28.448,103.738 U2.4 U2.2 ; C7.2 v2@35.306,113.919 ; C8.2 34.417,113.03 v2@35.306,113.919 ; C2.2 35.052,118.429 v2(35.052,119.38) ; C4.2 34.544,119.38 v2(35.052,119.38) ; v2@35.306,119.38 v2(35.052,119.38) ; v2(35.552,114.181) 35.552,114.165 v2@35.306,113.919 ; v2(37.65,114.925) 37.65,113.737 C3.2 ; v2(39.624,119.253) 40.702,119.253 C5.2 41.172,119.799 C6.2 ; C24.2 R5.1 ; C28.2 40.625,96.186 C26.2 v2(38.354,94.615) 38.354,94.187 R11.1 ; C23.2 66.371,92.722 C20.2 C19.2 67.444,92.122 C25.2 ; R11.1 C32.2 R11.1@35.687,91.52
  other v1: 55.449,112.199 56.549,112.199 57.649,112.199 58.749,112.199 54.349,113.299 55.449,113.299 56.549,113.299 57.649,113.299 58.749,113.299 54.349,114.399 55.449,114.399 56.549,114.399 57.649,114.399 58.749,114.399 54.349,115.499 55.449,115.499 56.549,115.499 57.649,115.499 58.749,115.499 54.349,116.599 56.549,116.599 57.649,116.599 58.749,116.599
MOT_A: H2.1 Q1.1 Q1.2 Q1.3 Q4.5 Q4.6 Q4.7 Q4.8 R6.2 U1.35 | length 120.9
  Top Layer w0.254: R6.2 40.502,85.925 v1(40.55,85.925) ; U1.35 64.936,116.649 64.941,116.654 65.359,116.654 65.986,116.027 66.379,116.027 66.631,115.775 85.726,115.775 86.826,116.875 86.85,116.875 87.275,117.3 ; v1(92.575,84.45) 99.9,91.775 99.9,115.95 97.75,118.1
  Bottom Layer w0.254: v1(40.55,85.925) 40.55,84.45 v1(92.575,84.45)
MOT_B: H2.2 Q2.1 Q2.2 Q2.3 Q5.5 Q5.6 Q5.7 Q5.8 R7.2 U1.30 | length 121.5
  Top Layer w0.254: R7.2 28.829,85.121 31.986,85.121 32.144,84.963 91.188,84.963 99.15,92.925 99.15,108.925 97.875,110.2 ; U1.30 62.212,114.149 62.851,113.51 67.792,113.51 68.058,113.244 68.625,113.244 v1(68.625,113.275) ; v1(68.55,114.4) 69.05,114.9 82.875,114.9 84.15,113.625 86.041,113.625 Q5.8
  Bottom Layer w0.254: v1(68.55,114.4) 68.7,114.4 68.725,114.375 68.625,114.275 v1(68.625,113.275)
MOT_C: H2.3 Q3.1 Q3.2 Q3.3 Q6.5 Q6.6 Q6.7 Q6.8 R8.2 U1.27 | length 80.7
  Top Layer w0.254: U1.27 U1.27 60.829,112.596 65.306,112.596 65.369,112.659 65.787,112.659 65.85,112.596 67.396,112.596 v1(67.425,112.625) 67.425,109.286 69.396,107.315 69.71,107.315 72.625,104.4 72.625,102.575 76.05,99.15 82.8,99.15 85.377,101.727 Q6.5
  Bottom Layer w0.254: R8.2 47.297,87.072 67.475,107.25 67.475,112.575 v1(67.425,112.625)
NetC9_1: C9.1 U1.15 | length 2.8
  Top Layer w0.254: C9.1 54.799,108.331 U1.15
NetC10_1: C10.1 U1.42 | length 3.6
  Top Layer w0.254: C10.1 56.326,120.663 56.68,120.309 56.68,120.27 56.799,120.151 U1.42
NetC10_2: C10.2 U1.43 | length 4
  Top Layer w0.254: C10.2 54.926,121.524 56.299,120.151 U1.43
NetC11_1: C11.1 U1.46 | length 5
  Top Layer w0.254: C11.1 52.07,121.055 52.975,120.15 54.425,120.15 54.799,119.776 U1.46
NetC12_1: C12.1 U1.41 | length 6.1
  Top Layer w0.254: U1.41 57.299,122.326 58.556,123.583 C12.1
NetC13_1: C13.1 U1.40 | length 2.7
  Top Layer w0.254: U1.40 57.799,119.724 58.101,120.026 C13.1
NetC13_2: C13.2 U1.39 | length 3
  Top Layer w0.254: U1.39 58.299,119.685 58.482,119.868 58.482,119.974 58.6,120.092 58.6,120.257 C13.2
NetC14_2: C14.2 U1.48 | length 9
  Top Layer w0.254: v1(48.15,118.625) 49.266,118.625 C14.2 ; v1(48.175,119.925) 48.21,119.96 52.066,119.96 52.842,119.184 52.842,118.633 52.851,118.624 U1.48
  Bottom Layer w0.254: v1(48.15,118.625) 48.175,118.65 v1(48.175,119.925)
NetC15_1: C15.1 U1.37 | length 3.1
  Top Layer w0.254: U1.37 62.351,118.624 C15.1
NetC16_1: C16.1 U1.38 | length 4.1
  Top Layer w0.254: U1.38 58.799,119.551 59.523,120.275 60.077,120.275 C16.1
NetC30_1: C30.1 D2.2 IC1.13 R6.1 R9.2 | length 29.8
  Top Layer w0.254: R6.1 R9.2 C30.1 ; D2.2 C30.1 ; IC1.13 42.129,113.549 42.129,112.585 42.254,112.46 42.254,91.719 C30.1
NetC31_1: C31.1 D3.2 IC1.12 R7.1 R10.2 | length 32.4
  Top Layer w0.254: D3.2 30.89,88.472 R7.1 R10.2 30.846,90.12 C31.1 40.088,99.078 IC1.12
NetC32_1: C32.1 D4.2 IC1.14 R8.1 R11.2 | length 39.5
  Top Layer w0.254: IC1.14 42.51,114.59 42.51,112.743 42.635,112.618 42.635,89.935 v1(42.5,89.8)
  Bottom Layer w0.254: D4.2 C32.1 ; R8.1 R11.2 ; v1(42.5,89.8) 36.007,89.8 R11.2 ; C32.1 R11.2 ; C32.1 R11.2
NetC33_1: C33.1 NT1.1 U1.23 | length 17.6
  Top Layer w0.254: U1.23 58.799,109.126 59.151,108.774 C33.1 61.332,108.275 v1(65.625,108.275) ; 64.706,115.8 64.86,115.646 66.221,115.646 66.425,115.442 v1(66.425,115.15)
  Bottom Layer w0.254: v1(65.625,108.275) 66.425,109.075 66.425,111.462 66.396,111.491 66.396,115.121 v1(66.425,115.15)
NetC33_2: C33.2 NT4.1 U1.24 | length 2.8
  Top Layer w0.254: U1.24 C33.2 60.898,110.109 NT4.1
NetC34_1: C34.1 NT3.1 U1.19 | length 15
  Top Layer w0.254: C34.1 55.815,107.765 56.799,108.749 U1.19 56.799,110.899 57.175,111.275 59.65,111.275 59.825,111.1 65.55,111.1 v1(65.575,111.125) ; 64.527,112.2 64.572,112.155 v1(65.578,112.155)
  Bottom Layer w0.254: v1(65.575,111.125) 65.578,111.128 v1(65.578,112.155)
NetC34_2: C34.2 NT6.1 U1.20 | length 3.9
  Top Layer w0.254: U1.20 57.325,110.148 57.325,109.025 57.215,108.915 C34.2 57.404,107.253 NT6.1
NetC35_1: C35.1 NT2.1 U1.21 | length 19.5
  Top Layer w0.254: U1.21 57.799,109.026 57.918,108.907 57.918,108.893 58.609,108.202 C35.1 58.609,106.416 v1(58.625,106.4) ; NT2.1 64.01,114.425 v1(64.875,114.425)
  Bottom Layer w0.254: v1(58.625,106.4) 64.475,106.4 64.875,106.8 64.875,107.768 64.736,107.907 64.736,114.286 v1(64.875,114.425)
NetC35_2: C35.2 NT5.1 U1.22 | length 4.5
  Top Layer w0.254: U1.22 58.299,109.051 60.071,107.279 NT5.1
NetIC1_5: IC1.5 U1.9 | length 22.6
  Top Layer w0.254: v1(36.575,110.775) 36.588,110.788 IC1.5 36.625,112.627 36.625,113.562 36.446,113.741 36.446,115.696 v1(36.625,115.875) 38.15,115.875 38.925,115.1 v1(38.925,114.35) ; v1(49.9,113.15) v1(49.9,113.15) 50.761,113.149 50.791,113.179 52.294,113.179 U1.9
  Bottom Layer w0.254: v1(36.625,115.875) v1@36.675,115.825 ; v1(38.925,114.35) 39.025,114.35 40.225,113.15 v1(49.9,113.15)
NetIC1_6: IC1.6 U1.12 | length 18.8
  Top Layer w0.254: v1(37.025,113.875) 37.088,113.812 IC1.6 ; v1(49.452,111.93) 49.595,111.93 49.879,111.646 52.321,111.646 U1.12
  Bottom Layer w0.254: v1(37.025,113.875) 37.025,112.125 37.117,112.033 43.32,112.033 43.541,112.254 43.959,112.254 44.26,111.953 49.475,111.953 v1(49.452,111.93)
NetIC1_10: IC1.10 U1.2 | length 22.3
  Top Layer w0.254: IC1.10 39.088,111.212 39.475,110.825 v1(39.475,110.725) ; v1(46.05,109.625) 46.125,109.7 46.075,109.75 v1(46.075,116.55) ; v1(49.226,116.649) U1.2
  Bottom Layer w0.254: v1(39.475,110.725) 40.575,109.625 v1(46.05,109.625) ; v1(46.075,116.55) 46.174,116.649 v1(49.226,116.649)
NetIC1_11: IC1.11 U1.3 | length 36.7
  Top Layer w0.254: IC1.11 39.588,113.213 39.6,113.201 v1(39.6,114.575) ; U1.3 52.42,116.245 53.066,116.245 53.451,116.629 53.303,116.777 53.303,117.316 52.029,118.59 52.029,119.284 v1(52.338,118.975)
  Bottom Layer w0.254: v1(39.6,114.575) 39.6,115.7 40.163,116.263 38.2,118.225 38.2,120.325 41.725,123.85 44.399,123.85 46.499,125.95 51.4,125.95 52.338,125.012 v1(52.338,118.975)
NetIC1_15: IC1.15 U1.1 | length 14.7
  Top Layer w0.254: IC1.15 42.96,115.09 v1(43.2,114.85) ; v1(47.425,114.925) 47.5,115 47.5,116.887 47.271,117.116 47.271,117.534 47.5,117.763 47.5,118.05 47.975,118.05 48.266,117.759 51.714,117.759 U1.1
  Bottom Layer w0.254: v1(43.2,114.85) 43.125,114.925 v1(47.425,114.925)
NetIC1_16: IC1.16 U1.16 | length 18.7
  Top Layer w0.254: IC1.16 43.249,115.59 43.831,115.008 43.831,111.831 v1(43.75,111.75) ; U1.16 v1(55.299,111.374)
  Bottom Layer w0.254: v1(43.75,111.75) 44.126,111.374 v1(55.299,111.374)
NetIC1_17: IC1.17 R1.1 U1.8 | length 16.1
  Top Layer w0.254: IC1.17 v1@43.66,116.09 ; R1.1@48.15,111.969 v1(48.15,116.075) ; v1(49.675,114.025) 50.046,113.654 52.319,113.654 U1.8
  Bottom Layer w0.254: v1(43.7,116.05) 43.704,116.046 48.121,116.046 v1(48.15,116.075) 48.15,115.55 v1(49.675,114.025)
NetIC1_18: IC1.18 U1.17 | length 22.8
  Top Layer w0.254: IC1.18 45.235,116.59 45.375,116.45 v1(45.375,110.35) ; U1.17 55.799,111.074 v1@56.2,111.475
  Bottom Layer w0.254: v1(45.375,110.35) 45.379,110.346 55.221,110.346 55.225,110.35 v1(56.275,111.4)
NetIC1_19: IC1.19 U1.18 | length 23.8
  Top Layer w0.254: IC1.19 41.592,117.086 43.669,117.086 43.673,117.09 46.535,117.09 46.75,116.875 v1(46.75,108.875) ; v1(55.675,108.825) 56.299,109.449 U1.18
  Bottom Layer w0.254: v1(46.75,108.875) 46.8,108.825 v1(55.675,108.825)
NetIC1_20: IC1.20 R2.1 U1.13 | length 18.3
  Top Layer w0.254: IC1.20 v1(43.46,117.59) ; v1(47.775,117.325) 48.3,117.325 48.275,117.3 48.722,116.853 48.722,116.44 48.871,116.291 48.871,111.704 49.425,111.15 50.078,111.15 R2.1 51.184,110.174 U1.13
  Bottom Layer w0.254: v1(43.46,117.59) 43.725,117.325 v1(47.775,117.325)
NetIC1_21: IC1.21 U1.4 | length 16
  Top Layer w0.254: IC1.21 41.592,118.094 43.669,118.094 43.673,118.09 44.64,118.09 45.847,119.297 51.178,119.297 51.4,119.075 v1(51.525,119.075) ; U1.4 53.524,115.649 v1(53.525,115.65)
  Bottom Layer w0.254: v1(51.525,119.075) 51.525,119 53.525,117 v1(53.525,115.65)
NetIC1_26: IC1.26 U1.47 | length 18
  Top Layer w0.254: IC1.26 39.588,122.063 39.875,122.35 49.125,122.35 51.025,120.45 52.136,120.45 52.817,119.769 54.231,119.769 54.299,119.701 U1.47
NetIC1_27: IC1.27 U1.11 | length 25.5
  Top Layer w0.254: IC1.27 39.088,122.662 39.201,122.775 v1(50.425,122.775) ; v1(50.425,112.15) 50.426,112.149 U1.11
  Bottom Layer w0.254: v1(50.425,112.15) 50.492,112.217 50.492,122.708 v1(50.425,122.775)
NetIC1_28: IC1.28 U1.10 | length 26.6
  Top Layer w0.254: IC1.28 38.588,122.938 39.15,123.5 v1(50.975,123.5) ; v1(51,112.675) 51.026,112.649 U1.10
  Bottom Layer w0.254: v1(50.975,123.5) 50.975,112.7 v1(51,112.675)
NetIC1_29: IC1.29 U1.6 | length 26.7
  Top Layer w0.254: IC1.29 38.088,124.238 38.711,124.861 48.264,124.861 v1(49.025,124.1) ; v1(49.375,116) 50.726,114.649 U1.6
  Bottom Layer w0.254: v1(49.025,124.1) 49.025,117.988 49.404,117.609 49.404,117.184 49.73,116.858 49.73,116.44 49.404,116.114 49.404,116.109 49.444,116.069 v1(49.375,116)
NetIC1_30: IC1.30 U1.7 | length 29.7
  Top Layer w0.254: IC1.30 37.588,124.888 37.96,125.26 v1(49.835,125.26) ; v1(49.825,114.825) 50.501,114.149 U1.7
  Bottom Layer w0.254: v1(49.825,114.825) 50.111,115.111 50.111,117.016 49.825,117.302 49.825,125.25 v1(49.835,125.26)
NetIC1_31: IC1.31 U1.5 | length 29.1
  Top Layer w0.254: IC1.31 37.088,119.812 40.225,116.675 40.225,113.95 41.75,112.425 v1(41.75,110.875) ; v1(52.275,110.85) 53.05,110.85 53.575,111.375 53.575,114.925 53.354,115.146 52.327,115.146 U1.5
  Bottom Layer w0.254: v1(41.75,110.875) 45.137,110.875 45.162,110.85 45.166,110.854 52.271,110.854 v1(52.275,110.85)
NetIC1_39: IC1.39 P1.4 | length 6.1
  Top Layer w0.254: P1.4 28.095,118.59 IC1.39
NetIC1_40: IC1.40 P1.3 | length 6.3
  Top Layer w0.254: P1.3 31.075,116.84 32.325,118.09 IC1.40
NetIC1_41: IC1.41 P1.2 | length 7.1
  Top Layer w0.254: P1.2 29.074,114.3 32.364,117.59 IC1.41
NetIC1_42: IC1.42 P1.1 | length 8.1
  Top Layer w0.254: P1.1 27.305,111.992 32.403,117.09 IC1.42
NetNT1_2: NT1.2 Q4.1 Q4.2 Q4.3 R12.2 U1.34 | length 24.9
  Top Layer w0.254: U1.34 61.951,116.149 62.3,115.8 63.894,115.8 63.894,116.032 64.042,116.181 65.119,116.181 v1(65.15,116.15) ; v1(65.875,117.5) 74.349,117.5 R12.2 80.339,119.761 Q4.3@80.655,119.445 ; Q4.3 Q4.3@80.655,119.445 ; Q4.1 Q4.2 Q4.3@80.655,119.445
  Bottom Layer w0.254: v1(65.15,116.15) 65.15,116.775 v1(65.875,117.5)
NetNT2_2: NT2.2 Q5.1 Q5.2 Q5.3 R13.2 U1.31 | length 24.9
  Top Layer w0.254: U1.31 60.806,114.681 62.775,114.681 ; NT2.2 62.775,114.681 ; Q5.1 Q5.2 Q5.3 79.727,111.252 79.229,111.75 77.108,111.75 R13.2 74.083,113.779 68.416,113.779 68.262,113.625 68.215,113.625 67.949,113.891 63.459,113.891 62.775,114.575 62.775,114.681
NetNT3_2: NT3.2 Q6.1 Q6.2 Q6.3 R14.2 U1.26 | length 34
  Top Layer w0.254: v1(59.599,112.149) U1.26 60.798,112.125 61.725,112.125 61.8,112.2 NT3.2 ; v1(62.275,109.175) 63.9,109.175 64.6,109.875 65.275,109.875 v1(68.325,106.825) ; v1(74.55,106.725) 76.61,104.665 R14.2 77.238,103.625 79.825,103.625 80.453,102.997 Q6.3 Q6.2 Q6.1
  Bottom Layer w0.254: v1(59.599,112.149) 59.599,111.949 59.55,111.9 v1(62.275,109.175) ; v1(68.325,106.825) 74.45,106.825 v1(74.55,106.725)
NetQ1_4: Q1.4 U1.36 | length 28.1
  Top Layer w0.254: U1.36 64.063,117.149 65.264,118.35 v1(66.2,118.35)
  Bottom Layer w0.254: v1(66.2,118.35) 66.577,118.35 67.685,117.242 67.685,116.338 68.326,115.697 83.531,115.697 Q1.4
NetQ2_4: Q2.4 U1.29 | length 30.5
  Top Layer w0.254: U1.29 62.173,113.649 62.693,113.129 67.634,113.129 67.9,112.863 67.962,112.863 67.962,109.288 69.554,107.696 77.134,107.696 77.244,107.806 83.381,107.806 v1(83.625,108.05)
  Bottom Layer w0.254: v1(83.625,108.05) 85.557,109.982 Q2.4
NetQ3_4: Q3.4 U1.28 | length 37
  Top Layer w0.254: U1.28 61.951,113.149 v1(62,113.1) ; v1(62.925,107.5) 62.925,101.225 v1(63.35,100.8)
  Bottom Layer w0.254: v1(62,113.1) 62.925,112.175 v1(62.925,107.5) ; v1(63.35,100.8) 84.89,100.8 Q3.4
NetQ4_4: Q4.4 U1.33 | length 21.5
  Top Layer w0.254: U1.33 61.912,115.649 62.436,115.125 v1(65.025,115.125) ; v1(66.8,116.875) 67.044,117.119 78.798,117.119 79.662,117.983 Q4.4
  Bottom Layer w0.254: v1(65.025,115.125) 65.377,115.125 66.035,115.783 66.035,116.11 v1(66.8,116.875)
NetQ5_4: Q5.4 U1.32 | length 28.6
  Top Layer w0.254: v1(59.549,115.149) U1.32 ; v1(76.925,108.2) 78.873,108.2 Q5.4
  Bottom Layer w0.254: v1(59.549,115.149) 64.336,115.149 64.833,115.646 65.359,115.646 65.654,115.941 65.654,116.442 66.591,117.379 67.009,117.379 67.304,117.084 67.304,116.18 68.58,114.904 68.959,114.904 75.663,108.2 v1(76.925,108.2)
NetQ6_4: Q6.4 U1.25 | length 31
  Top Layer w0.254: U1.25 60.794,111.629 66.829,111.629 v1(66.9,111.7) ; v1(66.35,107.275) 67.6,106.025 v1(69.575,106.025) ; v1(74.225,106.05) 75.25,105.025 75.25,101.1 76.1,100.25 79.178,100.25 Q6.4
  Bottom Layer w0.254: v1(66.35,107.275) 66.9,107.825 v1(66.9,111.7) ; v1(69.575,106.025) 69.6,106.05 v1(74.225,106.05)
NetR3_1: R3.1 U1.44 | length 3.7
  Top Layer w0.254: R3.1 54.434,120.966 55.799,119.601 U1.44
NRST: C1.1 IC1.7 S1.3 S1.4 | length 21.9
  Top Layer w0.254: S1.3 S1.4 36.173,102.798 37.9,104.525 37.9,108.85 C1.1 37.588,110.04 IC1.7
PVDD: C12.2 C16.2 C17.1 C18.1 C19.1 C20.1 C21.1 C22.1 C23.1 C25.1 C27.1 H1.1 Q1.5 Q1.6 Q1.7 Q1.8 Q2.5 Q2.6 Q2.7 Q2.8 Q3.5 Q3.6 Q3.7 Q3.8 R3.2 R4.2 U2.1 | length 37.9
  Top Layer w0.254: C12.2 60.948,125.083 v2(60.96,125.095) ; C16.2 v2(65.532,121.412) ; C27.1 C21.1 C22.1 ; v2(76.2,95.885) C22.1 ; C18.1 C17.1 C22.1
  Bottom Layer w0.254: U2.1 33.253,107.082 v2(33.147,107.188) 43.18,107.188 v2(45.593,104.775) 44.766,103.948 R4.2 ; C23.1 66.371,94.222 C20.1 ; C19.1 C20.1 ; C25.1 69.454,94.172 C20.1
  other v2: 53.594,124.079
  other v3: 78.95,101.85 78.975,102.95 78.95,104.25 78.975,105.35 79,110.1 79.025,111.1 79.025,112.475 79.025,113.525 79.025,118.2 79.025,119.15 79.025,120.55 79.025,121.575
SWCLK: IC1.37 P2.2 | length 7.3
  Top Layer w0.254: P2.2 31.921,119.59 IC1.37
SWDIO: IC1.34 P2.1 | length 7.9
  Top Layer w0.254: P2.1 34.848,123.952 35.588,123.212 IC1.34
VDD: C2.1 C3.1 C4.1 C5.1 C6.1 C7.1 C8.1 C14.1 C26.1 C28.1 D1.1 D2.1 D3.1 D4.1 IC1.1 IC1.9 IC1.24 IC1.36 IC1.48 R1.2 R2.2 U2.3 | length 26.5
  Top Layer w0.254: v2(32.766,112.014) 33.342,112.59 IC1.1 ; v2(32.893,122.682) 32.996,122.682 IC1.36
  Bottom Layer w0.254: C7.1 32.766,113.092 v2(32.766,112.014) 33.779,112.014 C8.1 ; v2(32.512,85.852) 32.512,85.873 D4.1 ; v2(32.893,122.682) 34.228,122.682 C4.1 ; v1(33.225,98.45) 33.253,98.478 U2.3 ; C26.1 41.387,98.886 C28.1 v3@41.656,99.949 ; v3@38.354,102.108 D1.1 ; v2(38.588,109.835) 38.588,111.359 C3.1 ; C5.1 42.672,119.823 C6.1 44.069,120.015 v2(44.069,119.761)
  other v3: 41.625,100 38.35,102.125
VSEN_PVDD: C24.1 D1.2 IC1.22 R4.1 R5.2 | length 20.1
  Top Layer w0.254: v1(40.55,118.35) 40.79,118.59 IC1.22 ; v1(43.225,113.8) 43.225,106.375 v1(43.25,106.35)
  Bottom Layer w0.254: D1.2 38.404,105.348 C24.1 R5.2 R4.1 43.25,105.545 v1(43.25,106.35) ; v1(40.55,118.35) 40.55,116.475 v1(43.225,113.8)
pads on no net: U1.49

## Polygon pours and split planes (outlines as drawn)
MOT_C on Top Layer "Top Layer-No Net" (solid, pour order 0): 85.471,101.346 90.551,101.346 92.964,98.933 98.425,98.933 98.425,103.632 95.631,105.029 85.471,105.918
MOT_B on Top Layer "Top Layer-No Net" (solid, pour order 2): 85.217,114.173 98.425,114.173 98.933,113.665 98.933,107.696 86.614,107.696 85.217,109.093
MOT_A on Top Layer "Top Layer-No Net" (solid, pour order 4): 85.217,122.174 98.679,122.174 98.679,116.459 85.217,116.459
PVDD on Bottom Layer "Top Layer-No Net" (solid, pour order 28): 81.026,101.346 81.026,105.918 78.232,105.918 78.232,101.346
PVDD on Bottom Layer "Top Layer-No Net" (solid, pour order 24): 81.026,109.601 81.026,114.173 78.359,114.173 78.359,109.601
PVDD on Bottom Layer "Top Layer-No Net" (solid, pour order 22): 80.772,117.602 78.359,117.602 78.359,122.174 80.772,122.174
MOT_A on Bottom Layer "Top Layer-No Net" (solid, pour order 8): 85.09,118.872 98.679,118.872 98.679,122.174 85.09,122.174
MOT_C on Bottom Layer "Top Layer-No Net" (solid, pour order 14): 85.09,105.918 97.023,105.034 98.425,103.632 98.425,98.933 92.964,98.933 90.424,101.473 88.011,101.473 88.011,102.616 85.09,102.616 85.09,105.918 86.741,105.918 86.868,105.791 96.266,105.791 97.028,105.029
MOT_B on Bottom Layer "Top Layer-No Net" (solid, pour order 12): 85.09,110.871 87.884,110.871 87.884,107.696 98.933,107.696 98.933,113.665 98.425,114.173 85.09,114.173
MOT_A on Bottom Layer "Top Layer-No Net" (solid, pour order 10): 88.011,118.872 88.011,116.459 98.679,116.459 98.679,118.872